# Altium PCB Kapitoshka.PcbDoc
Units mm, origin at the board's own origin, x right, y up, seen from the top; angles counter-clockwise.
Board outline 78 x 40 mm, 4 copper layers (Top Signal Layer, Power Layer, Ground Layer, Bottom Signal Layer), stack 0.778 mm thick; 93 components, 72 nets, 276 pads, 197 vias.
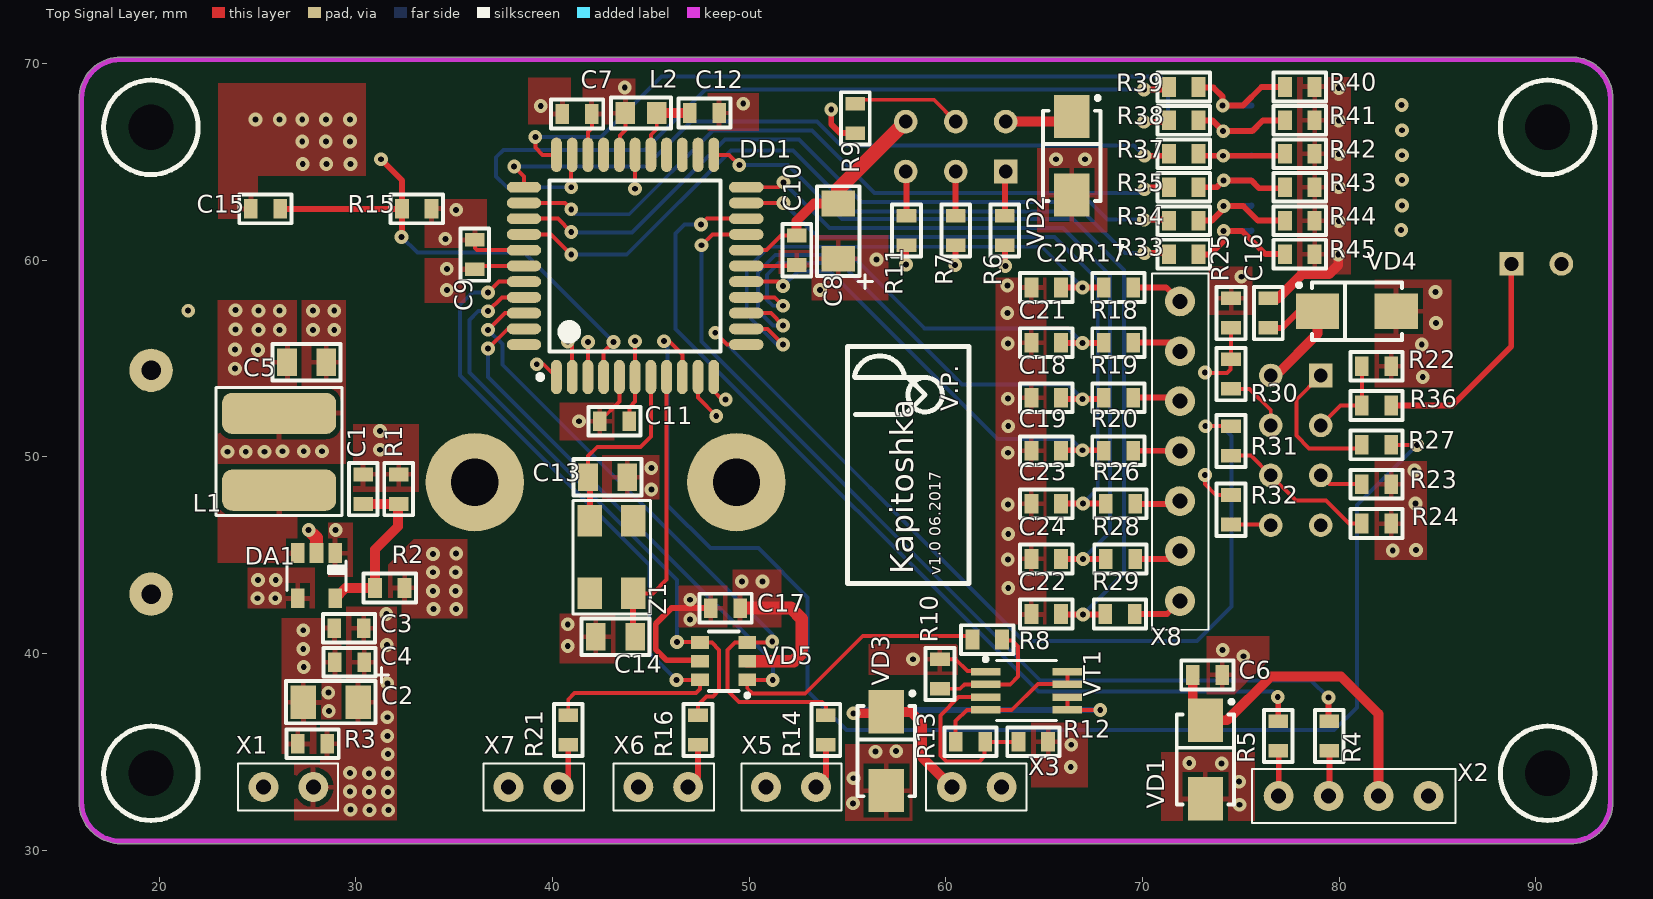
[diagram p0: Top Signal Layer view]
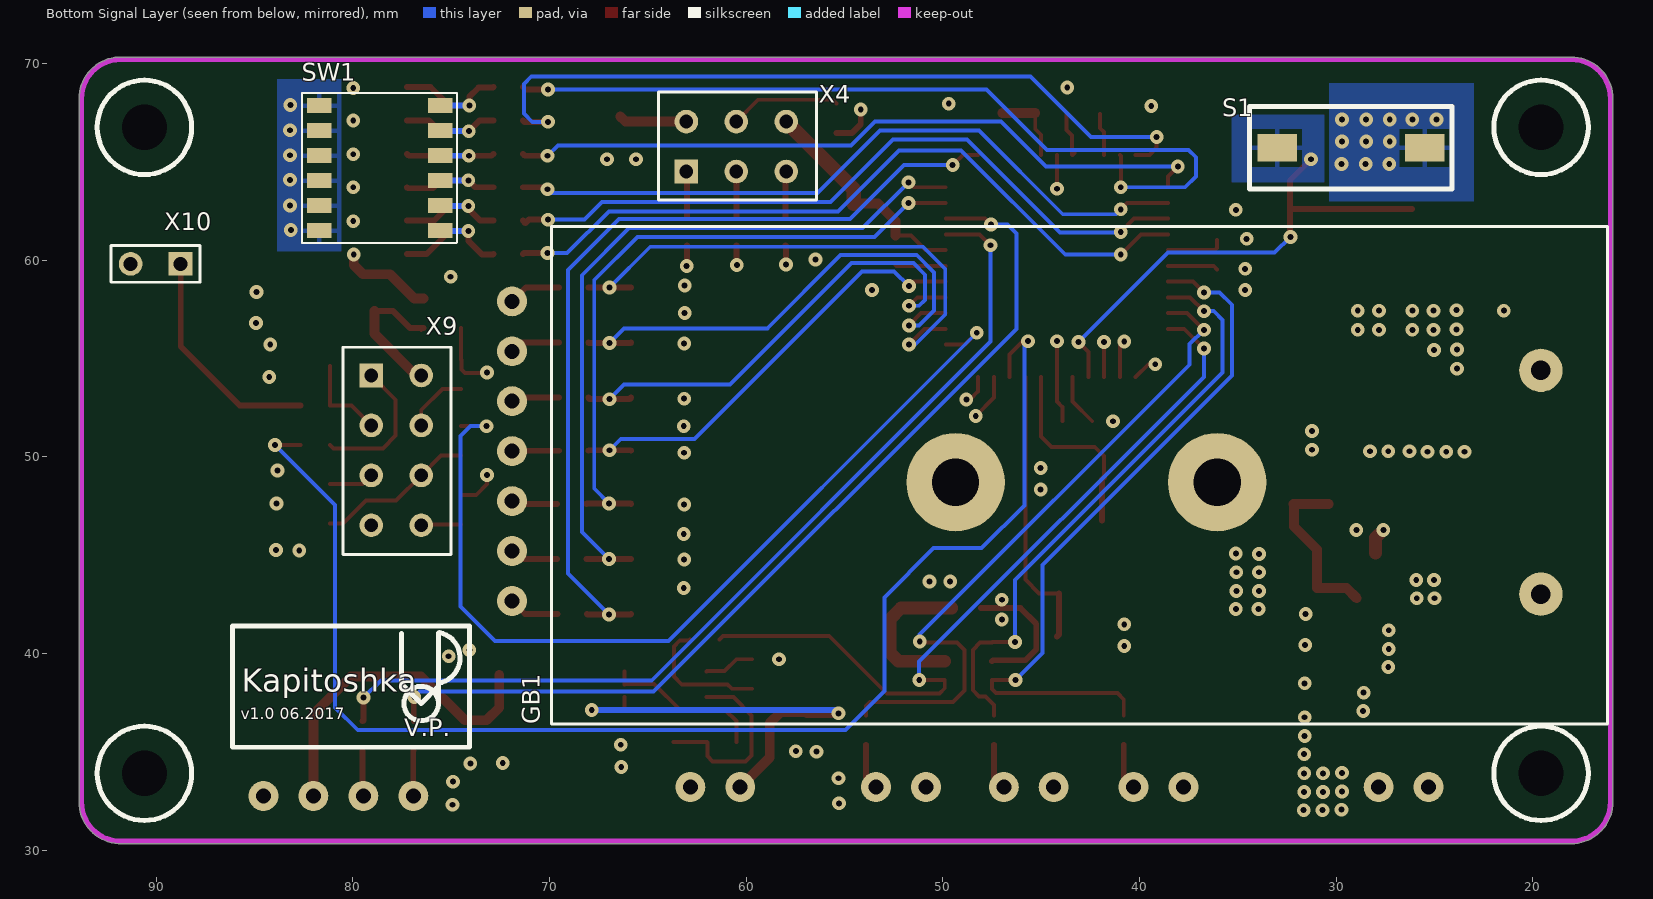
[diagram p1: Bottom Signal Layer view, seen from below]
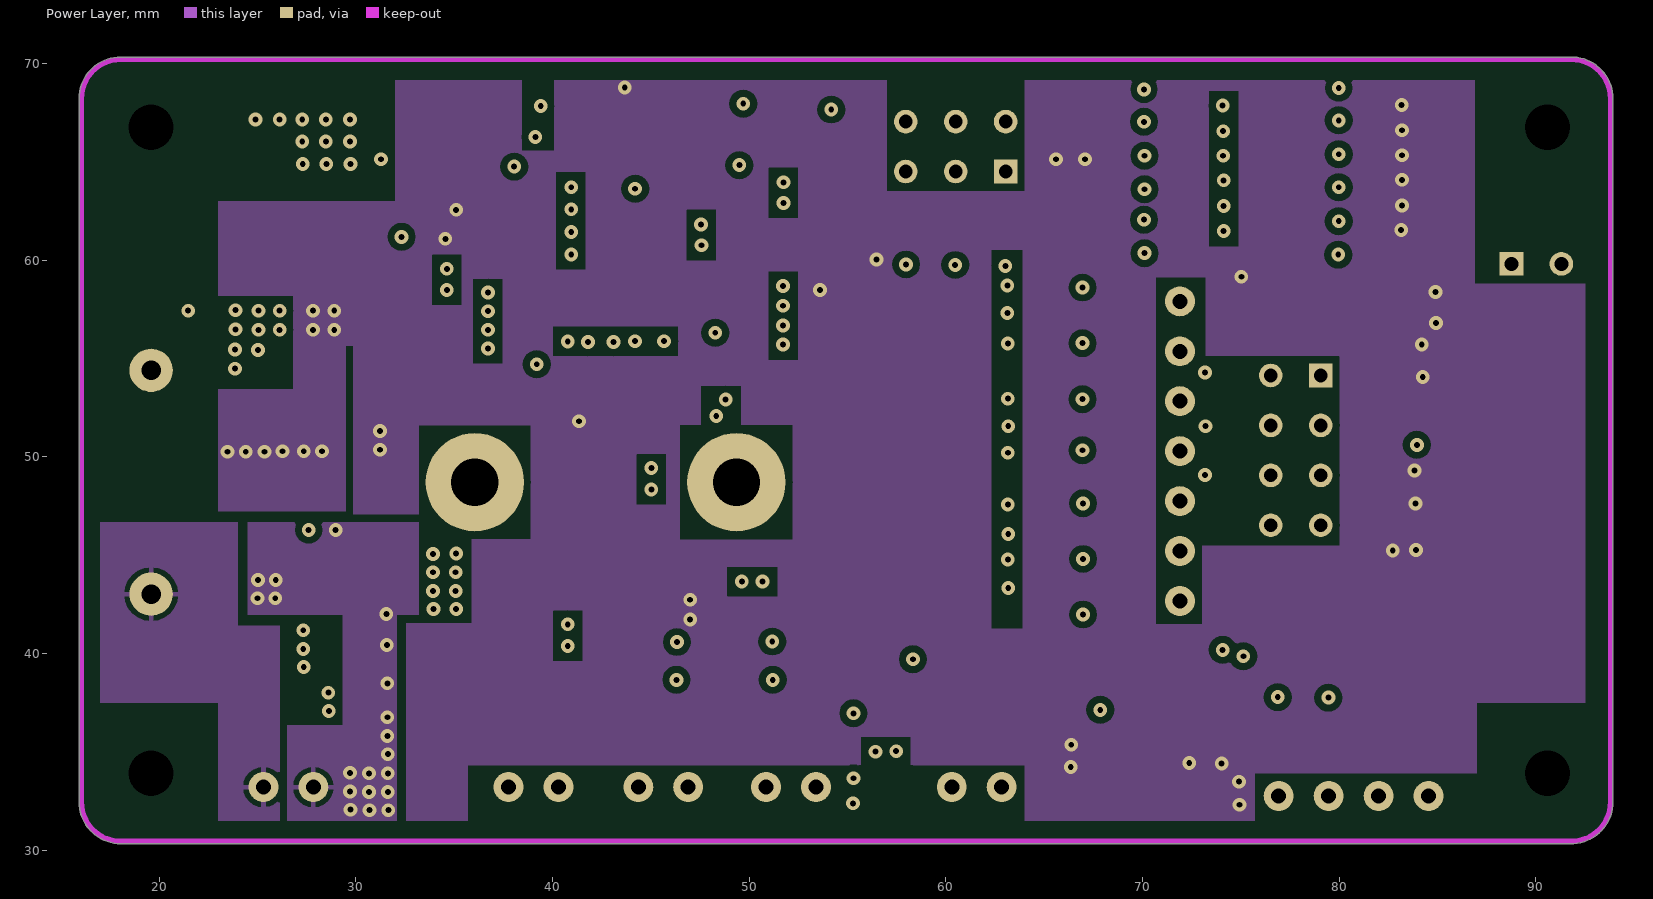
[diagram p2: Power Layer]
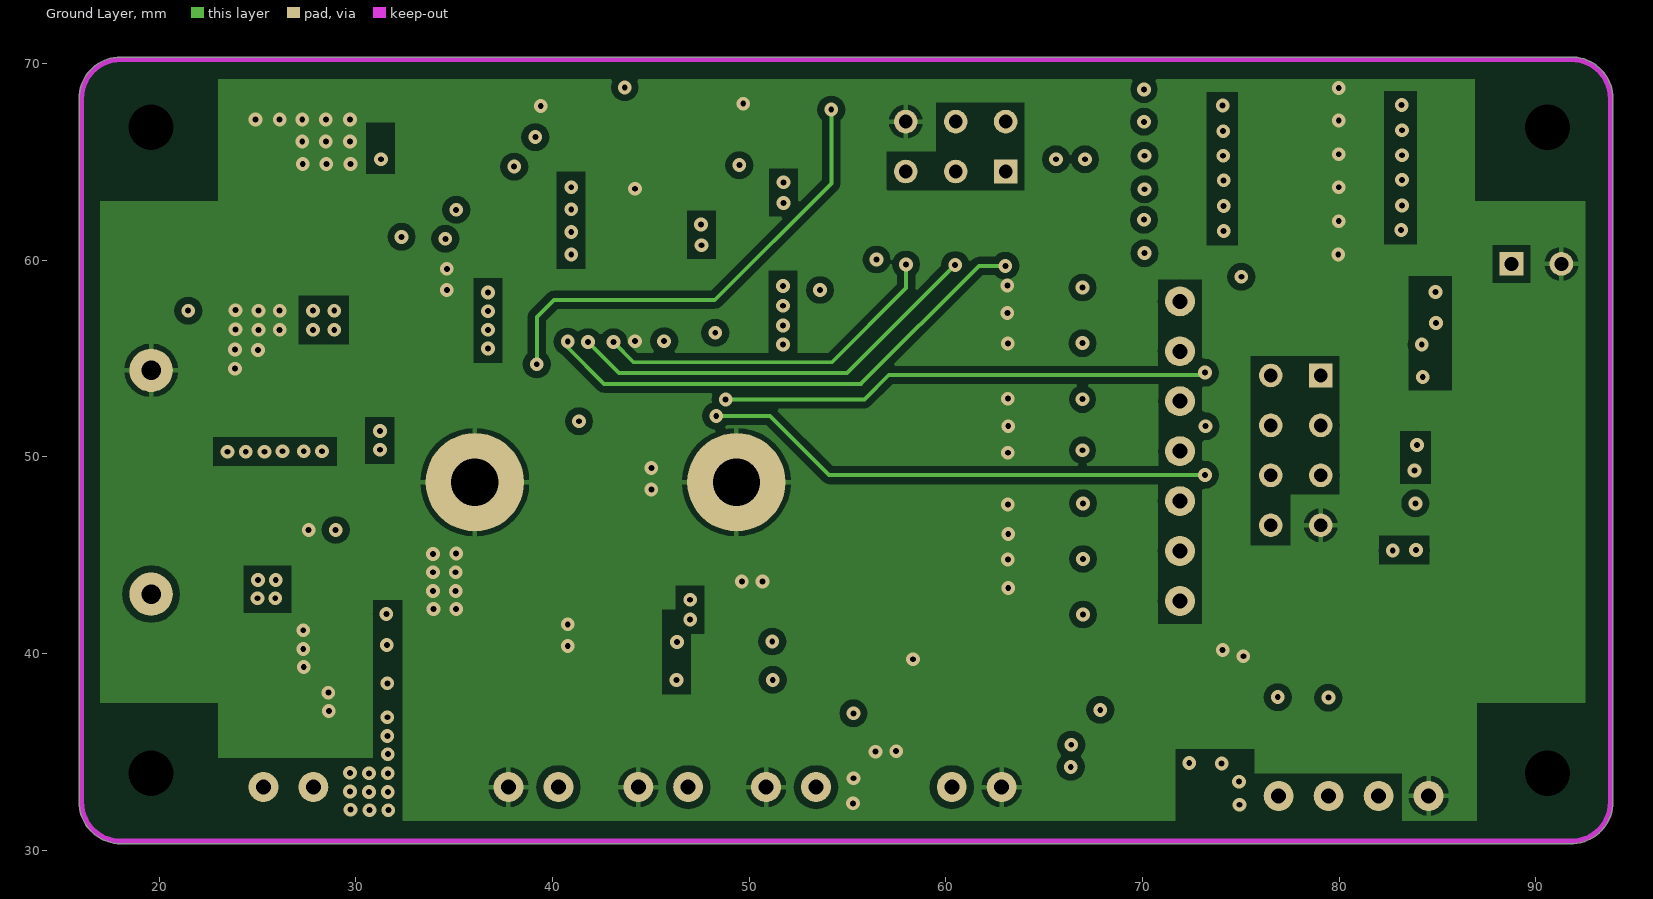
[diagram p3: Ground Layer]

## Layer stack, top to bottom
Top Solder: solder mask 0.0102, Solder Resist, Dk 3.5
Top Signal Layer: signal copper 0.0356
Dielectric 1: core 0.254, FR-4, Dk 4.2
Power Layer: signal copper 0.036
Dielectric 3: prepreg 0.127, Dk 4.2
Ground Layer: signal copper 0.036
Dielectric 2: core 0.254, FR-4, Dk 4.2
Bottom Signal Layer: signal copper 0.0356
Bottom Solder: solder mask 0.0102, Solder Resist, Dk 3.5

## Board outline
18.05,30.323 cw(c18.05,32.45) 15.923,32.45 cw(c16.05,32.45) 15.925,32.472 15.925,68.173 cw(c16.05,68.195) 15.923,68.195 cw(c18.05,68.195) 18.05,70.322 cw(c18.05,70.195) 18.072,70.32 91.773,70.32 cw(c91.795,70.195) 91.795,70.322 cw(c91.795,68.195) 91.887,70.32 91.895,70.32 cw(c91.895,70.195) 91.913,70.319 cw(c91.795,68.195) 93.922,68.195 cw(c93.795,68.195) 93.92,68.173 93.92,32.472 cw(c93.795,32.45) 93.922,32.45 cw(c91.795,32.45) 91.913,30.326 cw(c91.895,30.45) 91.895,30.325 91.887,30.325 cw(c91.795,32.45) 91.795,30.323 cw(c91.795,30.45) 91.773,30.325 18.072,30.325 cw(c18.05,30.45)

## Design rules (kind name [scope] priority, off if disabled: settings)
Clearance Clearance_Inner [OnLayer('Power Layer') OR OnLayer('Ground Layer')] p1: gap=0.35 ignorepadtopadclearanceinfootprint=FALSE except(0: Arc-Hole Track-Hole SMDPad-Hole THPad-Hole Via-Hole Fill-Hole Poly-Hole Region-Hole Text-Hole)
Clearance Clearance_1 [All] p2: gap=0.2 ignorepadtopadclearanceinfootprint=FALSE except(0: Arc-Hole Track-Hole SMDPad-Hole THPad-Hole Via-Hole Fill-Hole Poly-Hole Region-Hole Text-Hole)
ComponentClearance [All] p1: gap=0.254 collisioncheckmode=3 verticalgap=0 showdistances=FALSE
HoleSize [All] p1: absolutevalues=TRUE maxlimit=10 minlimit=0.025 maxpercent=80.000 minpercent=20.000
MinimumSolderMaskSliver [All] p1: minsoldermaskwidth=0.15
PolygonConnect PolygonConnect_via [IsVia] p1: connectstyle=Direct reliefconductorwidth=0.254 reliefentries=4 polygonreliefangle="90 Angle" airgapwidth=0.254
PolygonConnect PolygonConnect_1 [All] p2: connectstyle=Relief reliefconductorwidth=0.254 reliefentries=4 polygonreliefangle="90 Angle" airgapwidth=0.254
RoutingVias [All] p1: holewidth=0.711 width=1.27 viastyle="Through Hole" minholewidth=0.711 minwidth=1.27 maxholewidth=0.711 maxwidth=1.27
ShortCircuit [All] p1: allowed=TRUE
SilkToSilkClearance [All] p1: silktosilkclearance=0
SilkToSolderMaskClearance [IsPad] p1: minsilkscreentomaskgap=0 clearancetoexposedcopper=TRUE
SolderMaskExpansion [All] p1: expansion=0.05
Width Width_1 [All] p1: maxlimit=1 minlimit=0.1 preferedwidth=0.2
Width Width_3.3V [InNet('3,3В')] p2: maxlimit=1 minlimit=0.1 preferedwidth=0.7
24 further rules are at their usual default settings.

## Components (designator, comment, footprint, x,y, rotation, side; value= is the part's Value field where it differs from the comment)
C1 "0.01мк" C0603 30.375,48.35 r90 top
C2 "10мк" "3216 Case-A" 28.7,37.5 r180 top
C3 "4,7мк" C0603 29.65,41.275 r0 top
C4 "2,2мк" C0603 29.675,39.55 r180 top
C5 "10мк" C0805 27.5,54.8 r0 top
C6 "0,1мк" C0603 73.3,38.9 r180 top
C7 "15" C0603 41.25,67.425 r180 top
C8 "10мк" "3216 Case-A" 54.5,61.5 r90 top
C9 "0,1мк" C0603 36.05,60.275 r90 top
C10 "0,1мк" C0603 52.425,60.5 r270 top
C11 "0,1мк" C0603 43.15,51.8 r180 top
C12 "0,1мк" C0603 47.725,67.475 r180 top
C13 "16" C0805 42.8,48.95 r180 top
C14 "16" C0805 43.2,40.85 r0 top
C15 "0,1мк" C0603 25.4,62.6 r0 top
C16 "0,1мк" C0603 76.4,57.3 r270 top
C17 "0,1мк" C0603 48.8,42.3 r180 top
C18 "0,1мк" C0603 65.1,53 r0 top
C19 "0,1мк" C0603 65.1,50.3 r0 top
C20 "0,1мк" C0603 65.1,58.6 r0 top
C21 "0,1мк" C0603 65.1,55.8 r0 top
C22 "0,1мк" C0603 65.1,42 r0 top
C23 "0,1мк" C0603 65.1,47.6 r0 top
C24 "0,1мк" C0603 65.1,44.8 r0 top
DA1 "NCP1529" TSOP-5 28,43.95 r270 top
DD1 "ATmega32A-AU" TQFP-44 44.2,59.7 r90 top
GB1 "Вход питания" KLS5-818-D 42.7,48.7 r180 bottom
L1 "2,2мкГн" SDR0604 26.1,48.3 r180 top
L2 "18мГн" L0603 44.5,67.475 r0 top
R1 "820к" R0603 32.175,48.35 r270 top
R2 "180к" R0603 31.725,43.325 r0 top
R3 "47к" R0603 27.8,35.4 r180 top
R4 "47" R0603 79.5,35.8 r90 top
R5 "47" R0603 76.9,35.8 r90 top
R6 "47" R0603 63,61.5 r270 top
R7 "47" R0603 60.5,61.5 r270 top
R8 "47" R0603 62.1,40.7 r180 top
R9 "47" R0603 55.4,67.2 r270 top
R10 "10к" R0603 59.7,38.95 r90 top
R11 "47" R0603 58,61.5 r270 top
R12 "220" R0603 64.45,35.5 r0 top
R13 "10к" R0603 61.25,35.5 r0 top
R14 "82" R0603 53.9,36.1 r270 top
R15 "47к" R0603 33.1,62.6 r180 top
R16 "82" R0603 47.4,36.1 r270 top
R17 "100к" R0603 68.775,58.6 r0 top
R18 "100к" R0603 68.775,55.8 r0 top
R19 "100к" R0603 68.775,53 r0 top
R20 "100к" R0603 68.775,50.3 r0 top
R21 "82" R0603 40.8,36.1 r270 top
R22 "10к" R0603 81.9,54.6 r0 top
R23 "10к" R0603 81.9,48.6 r0 top
R24 "10к" R0603 81.9,46.6 r0 top
R25 "10к" R0603 74.5,57.3 r90 top
R26 "100к" R0603 68.875,47.6 r0 top
R27 "47" R0603 81.9,50.6 r180 top
R28 "100к" R0603 68.875,44.8 r0 top
R29 "100к" R0603 68.85,42 r0 top
R30 "47" R0603 74.5,54.2 r270 top
R31 "47" R0603 74.5,50.8 r270 top
R32 "47" R0603 74.5,47.3 r270 top
R33 "220" R0603 72.1,60.3 r180 top
R34 "220" R0603 72.1,62 r180 top
R35 "220" R0603 72.1,63.7 r180 top
R36 "560" R0603 81.9,52.6 r0 top
R37 "220" R0603 72.1,65.4 r180 top
R38 "220" R0603 72.1,67.1 r180 top
R39 "220" R0603 72.1,68.8 r180 top
R40 "47к" R0603 78,68.8 r180 top
R41 "47к" R0603 78,67.1 r180 top
R42 "47к" R0603 78,65.4 r180 top
R43 "47к" R0603 78,63.7 r180 top
R44 "47к" R0603 78,62 r180 top
R45 "47к" R0603 78,60.3 r180 top
S1 "RESET" "DTSM 32" 25.5,65.7 r0 bottom
SW1 "NHDS-06" NHDS-06 81.7,61.5 r90 bottom
VD1 "MBR140SFT1G" SMA 73.2,34.6 r270 top
VD2 "MBR140SFT1G" SMA 66.4,65.3 r270 top
VD3 "SS14" SMA 56.975,35.025 r270 top
VD4 "MBR140SFT1G" SMA 80.9,57.4 r0 top
VD5 "TPD4E001" SOT23-6 48.7,39.6 r180 top
VT1 "IRF7509" Micro8 64.1,38.1 r0 top
X1 "Разъем для тумблера питания" 2HOLE 25.3,33.2 r0 top
X2 "Модуль DIY SSD1306" "OLED SSD1306" 84.545,32.75 r180 top
X3 "Вибромотор" 2HOLE 60.3,33.2 r0 top
X4 "Программатор ISP mkII" PLS2-6 60.5,64.5 r90 bottom
X5 "Сигнальный светодиод №1" 2HOLE 53.4,33.2 r180 top
X6 "Красный светодиод №2" 2HOLE 46.9,33.2 r180 top
X7 "Зеленый светодиод №3" 2HOLE 40.3,33.2 r180 top
X8 "Матричная клавиатура" 7HOLE 71.9,57.9 r270 top
X9 "Модуль ESP-8266" ESP8266 79.06,51.59 r180 bottom
X10 "Перемычка" PLS2-2 91.3,59.8 r270 bottom
Z1 "8МГц" QSMD3.2x5 41.9,43.05 r90 top

## Footprints (in the part's own frame and the unit in brackets; to place one, negate y for a bottom-side part, rotate by r counter-clockwise, add the part's x,y. Pads: shape width x height; smd on the part's side, far side on the other; paste and mask are expansions set on the pad)
2HOLE [mil]
  round 60 hole 30: 1(0,0) 2(100,0)
  silkscreen extent -51,-47 150,47
7HOLE [mil]
  round 60 hole 30: 1(0,0) 2(100,0) 3(200,0) 4(300,0) 5(400,0) 6(500,0) 7(600,0)
  silkscreen extent -56,-56 657,57, body extent -50,-289 650,50, height 216
"3216 Case-A" [mm] "Tantalum capacitor 3216 Case-A"
  rect 1.3x1.7 smd: 1(-1.428,-0.024) 2(1.372,-0.024)
  silkscreen extent -2.95,-1.78 2.25,1.06, body extent -1.7,-0.9 1.7,0.9, height 1.7
C0603 [mm]
  rect 0.7x1 smd: 1(-0.75,0) 2(0.75,0)
  silkscreen extent -1.33,-0.73 1.33,0.73, body extent -0.8,-0.4 0.8,0.4, height 0.9
C0805 [mm]
  rect 1x1.4 smd: 1(-1,0) 2(1,0)
  silkscreen extent -1.73,-0.93 1.73,0.93, body extent -1,-0.62 1,0.63, height 0.78
"DTSM 32" [mm] "Кнопка"
  rect 2x1.4 smd: 1(0,0) 3(7.5,0)
  silkscreen extent -1.4,-2.1 8.9,2.1, body extent -0.25,-1.75 7.75,1.75, height 5.5
ESP8266 [mm] "Разъем для ESP8266"
  rect 1.2x1.2 hole 0.7: 1(0,2.54)
  round 1.2 hole 0.7: 2(2.54,2.54) 3(0,0) 4(2.54,0) 5(0,-2.54) 6(2.54,-2.54) 7(0,-5.08) 8(2.54,-5.08)
  silkscreen extent -1.45,-6.58 4.05,3.98, body extent -20.62,-8.52 4.38,5.98, height 5.78
KLS5-818-D [mm]
  round 2.2 hole 1: 1(23.11,-5.69) 2(23.11,5.69)
  round 5 hole 2.4: 2(-6.65,0) 2(6.65,0)
  silkscreen extent -27.2,-12.3 26.5,13, body extent -26.79,-11.81 26.01,12.69, height 13.03
L0603 [mm]
  rect 1x1.1 smd: 1(-0.8,0) 2(0.8,0)
  silkscreen extent -1.53,-0.78 1.53,0.78, body extent -0.8,-0.4 0.8,0.4, height 0.8
Micro8 [mm]
  rect 1.5x0.38 smd: 1(-2.075,0.975) 2(-2.075,0.325) 3(-2.075,-0.325) 4(-2.075,-0.975) 5(2.075,-0.975) 6(2.075,-0.325) 7(2.075,0.325) 8(2.075,0.975)
  silkscreen extent -2.17,-1.53 1.53,1.7, body extent -2.45,-1.5 2.45,1.5, height 1.15
NHDS-06 [mm] "Переключатель DIP 6поз. 1.27мм"
  rect 0.76x1.25 smd: 1(0,-6.15) 2(1.27,-6.15) 3(2.54,-6.15) 4(3.81,-6.15) 5(5.08,-6.15) 6(6.35,-6.15) 7(6.35,0) 8(5.08,0) 9(3.81,0) 10(2.54,0) 11(1.27,0) 12(0,0)
  silkscreen extent -0.63,-7 7,0.87, body extent -0.45,-6.16 6.83,-0.01, height 1.5
"OLED SSD1306" [mil] "OLED дисплей SSD1306"
  round 60 hole 30: 1(0,0) 2(100,0) 3(200,0) 4(300,0)
  silkscreen extent -54,-54 353,54, body extent -89,-1445 388,63, height 202
PLS2-2 [mm]
  rect 1.2x1.2 hole 0.7: 1(0,2.54)
  round 1.2 hole 0.7: 2(0,0)
  silkscreen extent -0.93,-0.99 0.93,3.53, body extent -1.25,-1.27 1.29,3.81, height 8.54
PLS2-6 [mm] "Разъем для программатора ISP"
  rect 1.2x1.2 hole 0.7: 1(0,2.54)
  round 1.2 hole 0.7: 2(2.54,2.54) 3(0,0) 4(2.54,0) 5(0,-2.54) 6(2.54,-2.54)
  silkscreen extent -1.45,-4.08 4.05,3.95, body extent -1.26,-3.91 3.82,3.71, height 8.54
QSMD3.2x5 [mm] "KX-9A 8MHz"
  rect 1.6x1.25 smd: 1(0,-2.2) 2(3.7,0) ""(0,0) ""(3.7,-2.2)
  silkscreen extent -1.05,-3.08 4.72,0.85, body extent -0.65,-2.7 4.35,0.5, height 1.01
R0603 [mm]
  rect 0.7x1 smd: 1(-0.75,0) 2(0.75,0)
  silkscreen extent -1.33,-0.73 1.33,0.73, body extent -0.85,-0.4 0.75,0.4, height 0.5
SDR0604 [mm] "SMD Power Inductors"
  rrect50% 5.8x2.1 smd: 1(0,0) 2(0,-3.9)
  silkscreen extent -3.2,-5.23 3.2,1.3, body extent -2.8,-4.7 2.8,0.8, height 4.55
SMA [mm]
  rect 2.2x1.8 smd: 1(-2,0) 2(2,0)
  silkscreen extent -3.04,-1.46 2.29,1.46, body extent -2.5,-1.35 2.5,1.35, height 2.15
SOT23-6 [mm]
  rect 0.9x0.64 smd: 1(-1.2,0.95) 2(-1.2,0) 3(-1.2,-0.95) 4(1.2,-0.95) 5(1.2,0) 6(1.2,0.95)
  silkscreen extent -1.3,-1.52 0.75,1.84, body extent -1.13,-1.4 1.3,1.4, height 1.09
TQFP-44 [mm]
  oval 1.75x0.55 smd: 1(-5.65,4) 2(-5.65,3.2) 3(-5.65,2.4) 4(-5.65,1.6) 5(-5.65,0.8) 6(-5.65,0) 7(-5.65,-0.8) 8(-5.65,-1.6) 9(-5.65,-2.4) 10(-5.65,-3.2) 11(-5.65,-4) 23(5.65,-4) 24(5.65,-3.2) 25(5.65,-2.4) 26(5.65,-1.6) 27(5.65,-0.8) 28(5.65,0) 29(5.65,0.8) 30(5.65,1.6) 31(5.65,2.4) 32(5.65,3.2) 33(5.65,4)
  oval 0.55x1.75 smd: 12(-4,-5.65) 13(-3.2,-5.65) 14(-2.4,-5.65) 15(-1.6,-5.65) 16(-0.8,-5.65) 17(0,-5.65) 18(0.8,-5.65) 19(1.6,-5.65) 20(2.4,-5.65) 21(3.2,-5.65) 22(4,-5.65) 34(4,5.65) 35(3.2,5.65) 36(2.4,5.65) 37(1.6,5.65) 38(0.8,5.65) 39(0,5.65) 40(-0.8,5.65) 41(-1.6,5.65) 42(-2.4,5.65) 43(-3.2,5.65) 44(-4,5.65)
  silkscreen extent -5.77,-4.35 4.35,4.95, body extent -6,-6 6,6, height 1.1
TSOP-5 [mm]
  rect 1x0.7 smd mask+0: 1(-1.15,0.95) 2(-1.15,0) 3(-1.15,-0.95) 4(1.15,-0.95) 5(1.15,0.95)
  silkscreen extent -0.75,-1.5 0.75,1.5, body extent -1.35,-1.5 1.35,1.5, height 1

## Part data
C1 C3 C4 C5 C6 C7 C9 C10 C11 C12 C13 C14 C15 C16 C17 C18 C19 C20 C21 C22 C23 C24: library part Capacitor, "Конденсатор"
C2 C8: library part Capacitor_pol, "Конденсатор полярный"
DA1: "Output Voltage Step-down  Converter"
DD1: "Микроконтроллер 44-pin"
GB1: library part "Battery compartment"
L1 L2: library part Inductor, "Катушка индуктивности"
R1 R2 R4 R5 R8 R10 R12 R17 R18 R19 R20 R26 R27 R28 R29 R30 R31 R32 R33 R34 R35 R36 R37 R38 R39: library part Resistor_0,125Вт, "0.125Вт 0805 47 Ом, 1%, Чип резистор (SMD)"
R3 R6 R7 R9 R11 R15 R22 R23 R24 R25 R40 R41 R42 R43 R44 R45: library part Resistor_0,125Вт, "Резистор"
R13: library part Resistor_0,125Вт, "0.125Вт 0805 10 кОм, 1%, Чип резистор (SMD)"
R14 R16 R21: library part Resistor_0,05Вт, "Резистор"
S1: library part Button_SMD, "Кнопка"
SW1: library part DS1040-06, "DIP переключатель"
VD1 VD2 VD3 VD4: library part DiodeSchottky, "Диод Шоттки"
VD5: "Диодная сборка"
VT1: "Комплементарная сборка МОП"
X1 X3 X5 X6 X7: library part Header_2_sct, "Разъем - 2 конт. розетка"
X2: library part Header_4_sct, "Разъем - 4 конт. розетка"
X4: library part Header_6_sct, "Разъем - 5 конт. розетка"
X8: library part Header_7_sct_, "Разъем - 5 конт. розетка"
X9: library part Header_8_sct, "Разъем - 5 конт. розетка"
X10: library part Header_2_plg, "Разъем - 2 конт. вилка"
Z1: library part Crystal, "Кварцевый резонатор"

## Free pads (board coordinates)
  round 0 hole 2.3: ""(19.58,33.9) ""(19.58,66.745) ""(90.595,33.9) ""(90.595,66.745)

## Via types
v1: diameter 0.7, hole 0.3, Top Signal Layer to Bottom Signal Layer, tented both sides, 197 vias

## Nets (pads, with @x,y where several pads share a name; then routed paths per layer and width w, separated by ;. In a path a pad name is that pad's centre, name@x,y a point inside that pad or via, vN(x,y) a via of type N, cw(c..) or ccw(c..) an arc to the next point about the centre after c; other vN are vias at no path point)
3,3В: C1.2 C5.2 C7.1 C8.1 C9.2 C10.2 C11.2 C17.2 DD1.5 DD1.17 DD1.29 DD1.31 DD1.38 L1.2 L2.1 R1.1 R12.2 R15.1 R22.2 R23.2 R24.2 R25.2 SW1.7 SW1.8 SW1.9 SW1.10 SW1.11 SW1.12 VD1.2 VD2.2 VD4.2 VD5.5 | length 19.7
  Top Signal Layer w0.2: C9.2 36.05,60.6 36.15,60.5 DD1.38 ; DD1.31 41.8,66.5 42,66.7 C7.1 ; C11.2 43.4,52.8 DD1.5 ; DD1.29@43.3,65.45 DD1.29 43.425,65.375 43.425,66.325 43.7,66.6 L2.1 ; DD1.17 52.35,59.7 C10.2@52.4,59.75
  Top Signal Layer w0.3: VD5.5 47.45,39.65 45.8,39.65 45.25,40.2 45.25,41.5 46.05,42.3 C17.2
  other v1: 74.925,32.3 74.9,33.475 66.35,34.225 74.025,34.4 72.375,34.425 66.375,35.35 47,41.725 47,42.725 82.725,45.225 83.9,45.25 83.875,47.625 83.825,49.3 23.475,50.25 24.4,50.25 25.35,50.25 26.275,50.275 27.35,50.275 28.275,50.275 31.225,50.35 31.225,51.3 41.35,51.8 84.25,54.05 84.2,55.7 27.825,56.45 28.9,56.45 84.925,56.8 27.825,57.425 28.9,57.425 84.9,58.375 53.6,58.475 75.025,59.15 56.475,60.025 34.55,61.075 83.15,61.525 35.1,62.55 83.2,62.775 83.2,64.075 65.6,65.125 67.075,65.125 83.2,65.325 83.2,66.6 83.175,67.875 43.675,68.775
3,7В: C2.1 C3.2 C4.1 DA1.1 DA1.4 R3.1 X1.2
  other v1: 30.7,32.025 31.65,32.025 29.725,32.05 30.675,32.95 31.625,32.95 29.7,32.975 30.675,33.9 31.625,33.9 29.7,33.925 31.625,34.875 31.6,35.8 31.6,36.75 31.6,38.475 31.575,40.425 31.55,42 25,42.8 25.9,42.8 25.025,43.725 25.925,43.725 28.975,46.275
GND: C2.2 C3.1 C4.2 C5.1 C6.1 C7.2 C8.2 C9.1 C10.1 C11.1 C12.1 C13.1 C14.1 C15.1 C16.1 C17.1 C18.1 C19.1 C20.1 C21.1 C22.1 C23.1 C24.1 DA1.2 DD1.6 DD1.18 DD1.28 DD1.39 GB1.2 R2.2 R3.2 R10.2 R40.1 R41.1 R42.1 R43.1 R44.1 R45.1 S1.1 VD3.2 VD5.2 VT1.1 X2.1 X3.2 X4.6 X5.2 X6.2 X7.2 X9.7 X10.2 | length 36.9
  Top Signal Layer w0.2: C9.1 36.225,59.7 DD1.39 ; C11.1 43.925,51.825 43.925,52.53 44.2,52.805 DD1.6 v1(44.2,55.875) ; v1(44.2,63.625) DD1.28 ; DD1.18 50.875,60.5 51.625,61.25 C10.1@52.4,61.25 ; R10.2 60.5,39.7 61.1,39.1 62,39.1 VT1.1
  Top Signal Layer w0.5: C10.1@52.4,61.25 52.4,61.975 53.297,62.872 C8.2 ; C16.1 76.875,58.05 78.1,59.275 79.475,59.275 79.95,59.75 v1(79.95,60.275)
  Top Signal Layer w0.65: v1(27.6,46.275) 28,45.875 DA1.2 ; C17.1 52.125,42.3 52.675,41.75 52.675,40.025 52.25,39.6 VD5.2
  Top Signal Layer w0.75: C8.2 54.524,63.604 X4.6
  other v1: 55.275,32.375 55.3,33.65 56.425,35 57.475,35.025 28.625,37.075 28.6,38 27.35,39.3 58.325,39.7 75.125,39.85 74.075,40.175 27.325,40.225 40.775,40.375 27.325,41.175 40.775,41.475 33.95,42.25 35.1,42.25 33.925,43.175 35.075,43.175 63.175,43.325 49.625,43.65 50.675,43.65 33.925,44.125 35.075,44.125 63.15,44.775 33.925,45.05 35.1,45.075 63.175,46.075 63.15,47.575 45.025,48.325 45.025,49.425 63.15,50.2 63.175,51.55 63.15,52.95 23.85,54.475 25.025,55.425 23.85,55.45 63.15,55.75 25.05,56.45 26.125,56.45 23.875,56.475 63.125,57.3 25.05,57.425 26.125,57.425 23.875,57.45 34.625,58.469 63.125,58.7 34.625,59.55 79.975,61.975 79.975,63.7 27.3,64.875 28.5,64.875 29.725,64.875 79.975,65.375 27.275,66.025 28.475,66.025 29.7,66.025 79.975,67.1 24.9,67.15 26.125,67.15 27.275,67.15 28.475,67.15 29.7,67.15 39.4,67.826 49.7,67.95 79.975,68.75
MCU_ADR_0: DD1.37 R33.2 | length 37.6
  Top Signal Layer w0.2: DD1.37 39.925,61.3 v1(40.95,60.275)
  Top Signal Layer w0.3: v1(70.1,60.35) 71.3,60.35 R33.2
  Bottom Signal Layer w0.2: v1(40.95,60.275) 43.775,60.275 49.075,65.575 52.225,65.575 55.325,62.475 66.975,62.475 69.1,60.35 v1(70.1,60.35)
MCU_ADR_1: DD1.36 R34.2 | length 36.9
  Top Signal Layer w0.2: DD1.36 40.275,62.1 v1(40.95,61.425)
  Top Signal Layer w0.3: v1(70.075,62.05) 71.05,62.05 71.225,61.875 R34.2
  Bottom Signal Layer w0.2: v1(40.95,61.425) 40.975,61.4 44.05,61.4 48.775,66.125 52.525,66.125 55.7,62.95 67.325,62.95 68.225,62.05 v1(70.075,62.05)
MCU_ADR_2: DD1.35 R35.2 | length 36.2
  Top Signal Layer w0.2: DD1.35 40.625,62.9 v1(40.95,62.575)
  Top Signal Layer w0.3: v1(70.1,63.6) 70.2,63.7 R35.2
  Bottom Signal Layer w0.2: v1(40.95,62.575) 41.2,62.325 43.9,62.325 48.15,66.575 53.2,66.575 56.375,63.4 69.9,63.4 v1(70.1,63.6)
MCU_ADR_3: DD1.34 R37.2 | length 36.3
  Top Signal Layer w0.2: v1(38.05,64.75) 38.55,64.25 DD1.34
  Top Signal Layer w0.3: v1(70.1,65.3) 71.25,65.3 R37.2
  Bottom Signal Layer w0.2: v1(38.05,64.75) 44.75,64.75 47.05,67.05 53.45,67.05 54.675,65.825 69.575,65.825 v1(70.1,65.3)
MCU_ADR_4: DD1.33 R38.2 | length 39.6
  Top Signal Layer w0.2: v1(39.125,66.25) 39.125,65.725 39.5,65.35 DD1.33
  Top Signal Layer w0.3: v1(70.075,67.025) 71.275,67.025 R38.2
  Bottom Signal Layer w0.2: v1(39.125,66.25) 42.475,66.25 45.55,69.325 70.925,69.325 71.3,68.95 71.3,67.45 70.875,67.025 v1(70.075,67.025)
MCU_ADR_5: DD1.32 R39.2 | length 42.4
  Top Signal Layer w0.2: v1(40.95,63.7) 40.95,65.3 DD1.32
  Top Signal Layer w0.3: v1(70.075,68.675) 71.225,68.675 R39.2
  Bottom Signal Layer w0.2: v1(40.95,63.7) 37.675,63.7 37.125,64.25 37.125,65.225 37.5,65.6 44.7,65.6 47.775,68.675 v1(70.075,68.675)
MCU_CH_PD: DD1.12 R31.1 | length 46.8
  Top Signal Layer w0.2: v1(48.275,56.3) 48.875,55.7 DD1.12 ; v1(73.2,51.55) R31.1
  Bottom Signal Layer w0.2: v1(48.275,56.3) 63.95,40.625 72.775,40.625 74.525,42.375 74.525,51.05 74.025,51.55 v1(73.2,51.55)
MCU_COL_1: C20.2 DD1.13 R17.1 | length 27.6
  Top Signal Layer w0.2: DD1.13 50.925,56.5 v1(51.725,55.7)
  Top Signal Layer w0.3: C20.2 v1(66.95,58.6) R17.1
  Bottom Signal Layer w0.2: v1(51.725,55.7) 51.4,55.7 49.875,57.225 49.875,59.55 51,60.675 64.875,60.675 v1(66.95,58.6)
MCU_COL_2: C21.2 DD1.14 R18.1 | length 26.6
  Top Signal Layer w0.2: DD1.14 51.1,57.3 v1(51.725,56.675)
  Top Signal Layer w0.3: C21.2 65.875,55.775 v1(66.95,55.775) 68,55.775 R18.1
  Bottom Signal Layer w0.2: v1(51.725,56.675) 51.2,56.675 50.45,57.425 50.45,59.375 51.325,60.25 55.2,60.25 58.925,56.525 66.2,56.525 v1(66.95,55.775)
MCU_COL_3: C18.2 DD1.15 R19.1 | length 25.7
  Top Signal Layer w0.2: DD1.15 51.3,58.1 v1(51.725,57.675)
  Top Signal Layer w0.3: C18.2 65.925,52.925 v1(66.95,52.925) 67.95,52.925 R19.1
  Bottom Signal Layer w0.2: v1(51.725,57.675) 51.2,57.675 50.9,57.975 50.9,59.25 51.5,59.85 54.65,59.85 60.825,53.675 66.2,53.675 v1(66.95,52.925)
MCU_DOUT1: DD1.42 R14.1 VD5.3 | length 34.3
  Top Signal Layer w0.2: v1(36.725,56.45) 37.575,57.3 DD1.42 ; v1(51.175,40.6) 51.125,40.55 VD5.3 49.275,40.55 48.9,40.175 48.9,38.1 49.475,37.525 53.7,37.525 53.9,37.325 R14.1
  Bottom Signal Layer w0.2: v1(36.725,56.45) 37.45,55.725 37.45,54.675 51.175,40.95 v1(51.175,40.6)
MCU_DOUT2: DD1.41 R16.1 VD5.4 | length 30.3
  Top Signal Layer w0.2: v1(36.725,57.4) 37.425,58.1 DD1.41 ; v1(46.325,40.575) 47.475,40.575 VD5.4 48.1,40.55 48.475,40.175 48.475,38.125 48.15,37.8 47.825,37.8 47.4,37.375 R16.1
  Bottom Signal Layer w0.2: v1(36.725,57.4) 36.225,57.4 35.775,56.95 35.775,54.275 46.325,43.725 v1(46.325,40.575)
MCU_DOUT3: DD1.40 R21.1 VD5.6 | length 36.8
  Top Signal Layer w0.2: v1(36.725,58.35) 37.275,58.9 DD1.40 ; R21.1 40.8,37.65 41.125,37.975 47.285,37.975 47.5,38.19 VD5.6 v1(46.3,38.65)
  Bottom Signal Layer w0.2: v1(36.725,58.35) 35.925,58.35 35.3,57.725 35.3,54.125 44.93,44.495 44.93,40.02 v1(46.3,38.65)
MCU_ESP_RESET: DD1.11 R25.1 R30.1 | length 30
  Top Signal Layer w0.2: DD1.11 48.2,53.325 48.622,52.903 v1(48.802,52.903) ; v1(73.175,54.275) 73.2,54.25 74.3,54.25 74.475,54.425 74.475,54.925 R30.1 R25.1
  Ground Layer w0.2: v1(48.802,52.903) 55.853,52.903 57.098,54.148 73.048,54.148 v1(73.175,54.275)
MCU_LINE_1: C19.2 DD1.16 R20.1 | length 23.5
  Top Signal Layer w0.2: DD1.16 51.5,58.9 v1(51.725,58.675)
  Top Signal Layer w0.3: C19.2 65.875,50.325 v1(66.95,50.325) 68,50.325 R20.1
  Bottom Signal Layer w0.2: v1(51.725,58.675) 52.475,59.425 54.1,59.425 62.625,50.9 66.375,50.9 v1(66.95,50.325)
MCU_LINE_2: C23.2 DD1.21 R26.1 | length 33.5
  Top Signal Layer w0.2: DD1.21 v1(51.75,62.9)
  Top Signal Layer w0.3: C23.2 65.875,47.625 v1(66.975,47.625) 68.1,47.625 R26.1
  Bottom Signal Layer w0.2: v1(51.75,62.9) 53.475,61.175 65.525,61.175 67.725,58.975 67.725,48.375 v1(66.975,47.625)
MCU_LINE_3: C24.2 DD1.22 R28.1 | length 37.8
  Top Signal Layer w0.2: DD1.22 51.5,63.7 v1(51.75,63.95)
  Top Signal Layer w0.3: C24.2 v1(66.975,44.8) R28.1
  Bottom Signal Layer w0.2: v1(51.75,63.95) 54.075,61.625 65.95,61.625 68.35,59.225 68.35,46.175 v1(66.975,44.8)
MCU_LINE_4: C22.2 DD1.23 R29.1 | length 43.9
  Top Signal Layer w0.2: DD1.23 48.975,65.35 v1(49.5,64.825)
  Top Signal Layer w0.3: C22.2 65.875,41.975 v1(66.975,41.975) 68.075,41.975 R29.1
  Bottom Signal Layer w0.2: v1(49.5,64.825) 51.975,64.825 54.725,62.075 66.475,62.075 69.05,59.5 69.05,44.05 v1(66.975,41.975)
MCU_MISO: DD1.2 R6.2 | length 28.7
  Top Signal Layer w0.2: v1(40.775,55.85) 41,55.625 DD1.2
  Top Signal Layer w0.3: R6.2 63,59.725 v1(63.025,59.7)
  Ground Layer w0.2: v1(40.775,55.85) 40.775,55.55 42.622,53.703 55.689,53.703 ; 55.689,53.711 61.678,59.7 v1(63.025,59.7)
MCU_MOSI: DD1.1 R9.2 | length 27.4
  Top Signal Layer w0.2: v1(39.2,54.7) 39.55,54.7 DD1.1
  Top Signal Layer w0.3: v1(54.175,67.65) 54.175,66.9 54.625,66.45 R9.2
  Ground Layer w0.2: v1(39.2,54.7) 39.2,57.1 40.075,57.975 48.25,57.975 54.175,63.9 v1(54.175,67.65)
MCU_MOTOR: DD1.43 R8.2 VD5.1 | length 39.7
  Top Signal Layer w0.2: v1(36.725,55.5) 37.725,56.5 DD1.43 ; v1(51.2,38.65) VD5.1 49.9,38.225 50.175,37.95 52.85,37.95 55.775,40.875 61.175,40.875 R8.2
  Bottom Signal Layer w0.2: v1(36.725,55.5) 36.725,54.05 51.2,39.575 v1(51.2,38.65)
MCU_RESET: C15.2 DD1.4 R11.2 R15.2 S1.3 | length 44.6
  Top Signal Layer w0.2: DD1.4 42.6,55.325 v1(43.1,55.825)
  Top Signal Layer w0.3: C15.2 R15.2 ; v1(31.275,65.125) 32.35,64.05 R15.2 ; v1(32.325,61.175) 32.35,61.2 R15.2 ; v1(57.975,59.775) 57.975,60.725 R11.2
  Ground Layer w0.2: v1(43.1,55.825) 44.122,54.803 54.203,54.803 57.975,58.575 v1(57.975,59.775)
  Bottom Signal Layer w0.2: v1(32.325,61.175) 33.125,60.375 38.55,60.375 v1(43.1,55.825)
MCU_RX: DD1.9 R27.1 | length 69.7
  Top Signal Layer w0.2: v1(45.675,55.875) 45.925,55.875 46.6,55.2 DD1.9 ; R27.1 v1(83.95,50.6)
  Bottom Signal Layer w0.2: v1@45.85,55.875 45.85,47.525 48.025,45.35 50.475,45.35 52.975,42.85 52.975,38.075 54.95,36.1 79.75,36.1 80.9,37.25 80.9,47.55 v1(83.95,50.6)
MCU_SCK: DD1.3 R7.2 | length 24.4
  Top Signal Layer w0.2: DD1.3 v1(41.8,55.825)
  Top Signal Layer w0.3: v1(60.475,59.75) 60.5,59.775 R7.2
  Ground Layer w0.2: v1(41.8,55.825) 43.372,54.253 54.978,54.253 v1(60.475,59.75)
MCU_SCL: DD1.19 R4.2 | length 48
  Top Signal Layer w0.2: v1(47.575,60.75) 48.125,61.3 DD1.19
  Top Signal Layer w0.3: v1(79.45,37.75) 79.45,36.6 R4.2
  Bottom Signal Layer w0.2: v1(47.575,60.75) 47.575,55.85 64.8,38.625 78.575,38.625 v1(79.45,37.75)
MCU_SDA: DD1.20 R5.2 | length 48.4
  Top Signal Layer w0.2: v1(47.55,61.8) 47.85,62.1 DD1.20
  Top Signal Layer w0.3: v1(76.875,37.775) 76.9,37.75 R5.2
  Bottom Signal Layer w0.2: v1(47.55,61.8) 46.7,61.8 46.25,61.35 46.25,56.5 64.7,38.05 76.6,38.05 v1(76.875,37.775)
MCU_TX: DD1.10 R32.1 | length 30.5
  Top Signal Layer w0.2: DD1.10 47.4,53 v1(48.325,52.075) ; v1(73.175,49.075) 73.175,48.6 73.725,48.05 R32.1
  Ground Layer w0.2: v1(48.325,52.075) 51.05,52.075 54.057,49.068 73.168,49.068 v1(73.175,49.075)
NetC1_1: C1.1 DA1.5 R1.2 R2.1 | length 8.8
  Top Signal Layer w0.5: DA1.5 29.475,43.325 R2.1 30.975,45.275 32.15,46.45 32.15,47.575 R1.2 C1.1
NetC6_2: C6.2 VD1.1 X2.2 | length 17.3
  Top Signal Layer w0.5: C6.2 72.55,37.25 VD1.1 74.3,36.6 76.525,38.825 80.1,38.825 82,36.925 82,32.755 X2.2
NetC12_2: C12.2 DD1.27 L2.2 | length 4.1
  Top Signal Layer w0.2: DD1.27 45,66.37 45.3,66.67 L2.2 ; L2.2@45.3,67.6 L2.2@45.4,67.5
  Top Signal Layer w0.5: L2.2 C12.2
NetC13_2: C13.2 DD1.7 Z1.2 | length 10
  Top Signal Layer w0.2: C13.2 41.8,50.025 42.275,50.5 44.475,50.5 45,51.025 DD1.7
  Top Signal Layer w0.3: C13.2 41.9,48.85 Z1.2
NetC14_2: C14.2 DD1.8 Z1.1 | length 14.5
  Top Signal Layer w0.2: Z1.1 45.1,43.05 45.8,43.75 DD1.8
  Top Signal Layer w0.3: Z1.1 44.1,40.95 C14.2
NetC16_2: C16.2 VD4.1 X9.2 | length 7.4
  Top Signal Layer w0.2: C16.2 C16.2@76.52,56.43
  Top Signal Layer w0.3: C16.2 77.1,56.55 77.95,57.4 VD4.1
  Top Signal Layer w0.5: X9.2 76.78,54.13 78.9,56.25 VD4.1
NetDA1_3: DA1.3 L1.1
NetGB1_1: GB1.1 X1.1
NetR4_1: R4.1 X2.3 | length 2.3
  Top Signal Layer w0.3: X2.3 79.5,32.785 R4.1
NetR5_1: R5.1 X2.4 | length 2.3
  Top Signal Layer w0.3: R5.1 76.925,35.025 X2.4
NetR6_1: R6.1 X4.1 | length 2.3
  Top Signal Layer w0.3: R6.1 63,64.46 X4.1
NetR7_1: R7.1 X4.3 | length 2.3
  Top Signal Layer w0.3: R7.1 X4.3
NetR8_1: R8.1 R10.1 VT1.2 | length 6.7
  Top Signal Layer w0.2: R10.1 60.725,38.2 60.95,38.425 VT1.2 63.275,38.425 63.675,38.825 63.675,40.35 63.375,40.65 62.9,40.65 R8.1
NetR9_1: R9.1 X4.4 | length 5.6
  Top Signal Layer w0.2: R9.1 55.6,68.15 59.39,68.15 X4.4
NetR11_1: R11.1 X4.5 | length 2.3
  Top Signal Layer w0.3: X4.5 58,64.46 R11.1
NetR12_1: R12.1 R13.2 VT1.3 | length 9.7
  Top Signal Layer w0.2: VT1.3 60.65,37.775 59.725,36.85 59.725,34.8 60.025,34.5 61.7,34.5 61.975,34.775 61.975,35.475 R13.2 R12.1
NetR13_1: R13.1 VT1.4 VT1.7 VT1.8 | length 8.2
  Top Signal Layer w0.2: R13.1 60.5,36.55 61.075,37.125 VT1.4 63.35,37.125 64.675,38.45 66.15,38.45 VT1.7 VT1.8
NetR14_2: R14.2 X5.1 | length 2.4
  Top Signal Layer w0.3: X5.1 53.9,33.7 R14.2
NetR16_2: R16.2 X6.1 | length 2.4
  Top Signal Layer w0.3: X6.1 47.4,33.7 R16.2
NetR17_2: R17.2 X8.1 | length 2.7
  Top Signal Layer w0.3: R17.2 71.2,58.6 X8.1
NetR18_2: R18.2 X8.2 | length 2.6
  Top Signal Layer w0.3: R18.2 71.46,55.8 X8.2
NetR19_2: R19.2 X8.3 | length 2.4
  Top Signal Layer w0.3: R19.2 71.72,53 X8.3
NetR20_2: R20.2 X8.4 | length 2.4
  Top Signal Layer w0.3: R20.2 71.88,50.3 X8.4
NetR21_2: R21.2 X7.1 | length 2.4
  Top Signal Layer w0.3: X7.1 40.8,33.7 R21.2
NetR22_1: R22.1 R36.1 X9.3 | length 4.5
  Top Signal Layer w0.2: X9.3 80.07,52.6 R36.1 R22.1
NetR23_1: R23.1 X9.5 | length 2.3
  Top Signal Layer w0.2: X9.5 79.51,48.6 R23.1
NetR24_1: R24.1 R31.2 X9.6 | length 8.1
  Top Signal Layer w0.2: R31.2 75.52,50.05 X9.6 77.795,47.775 79.325,47.775 80.5,46.6 R24.1
NetR26_2: R26.2 X8.5 | length 2.3
  Top Signal Layer w0.3: R26.2 71.76,47.6 X8.5
NetR27_2: R27.2 X9.1 | length 7.2
  Top Signal Layer w0.2: X9.1 77.825,52.895 77.825,51.075 78.475,50.425 80.975,50.425 R27.2
NetR28_2: R28.2 X8.6 | length 2.4
  Top Signal Layer w0.3: R28.2 71.5,44.8 X8.6
NetR29_2: R29.2 X8.7 | length 2.6
  Top Signal Layer w0.3: R29.2 71.24,42 X8.7
NetR30_2: R30.2 X9.4 | length 3.3
  Top Signal Layer w0.2: R30.2 75.45,53.45 76.52,52.38 X9.4
NetR32_2: R32.2 X9.8 | length 2
  Top Signal Layer w0.2: R32.2 76.48,46.55 X9.8
NetR33_1: R33.1 R45.2 SW1.1 | length 7.1
  Top Signal Layer w0.3: R33.1 72.875,60.275 73.425,60.275 74.125,60.975 v1(74.125,61.475) 75.075,61.475 76.25,60.3 R45.2
  Bottom Signal Layer w0.3: v1(74.125,61.475) 75.525,61.475 SW1.1
NetR34_1: R34.1 R44.2 SW1.2 | length 6.5
  Top Signal Layer w0.3: R34.1 73.525,62 74.125,62.6 v1(74.125,62.75) 75.125,62.75 75.875,62 R44.2
  Bottom Signal Layer w0.3: v1(74.125,62.75) 75.53,62.75 SW1.2
NetR35_1: R35.1 R43.2 SW1.3 | length 6.2
  Top Signal Layer w0.3: R35.1 73.775,63.7 v1(74.125,64.05) 75.525,64.05 75.925,63.65 77.2,63.65 R43.2
  Bottom Signal Layer w0.3: v1(74.125,64.05) 75.54,64.05 SW1.3
NetR36_2: R36.2 X10.1 | length 11.5
  Top Signal Layer w0.3: R36.2 85.75,52.6 88.75,55.6 88.75,59.79 X10.1
NetR37_1: R37.1 R42.2 SW1.4 | length 5.9
  Top Signal Layer w0.3: R37.1 72.95,65.3 v1(74.1,65.3) 77.15,65.3 R42.2
  Bottom Signal Layer w0.3: v1(74.1,65.3) 75.54,65.3 SW1.4
NetR38_1: R38.1 R41.2 SW1.5 | length 6.3
  Top Signal Layer w0.3: R38.1 73.55,67.1 v1(74.1,66.55) 75.575,66.55 76.125,67.1 R41.2
  Bottom Signal Layer w0.3: v1(74.1,66.55) 75.52,66.55 SW1.5
NetR39_1: R39.1 R40.2 SW1.6 | length 6.9
  Top Signal Layer w0.3: R39.1 72.875,68.775 73.6,68.775 74.075,68.3 v1(74.075,67.85) 75.1,67.85 76.05,68.8 R40.2
  Bottom Signal Layer w0.3: v1(74.075,67.85) SW1.6
NetVD2_1: VD2.1 X4.2 | length 3.5
  Top Signal Layer w0.5: X4.2 66.14,67.04 VD2.1
NetVD3_1: VD3.1 VT1.5 VT1.6 X3.1 | length 22.6
  Top Signal Layer w0.2: VT1.6 VT1.5 v1(67.85,37.125)
  Top Signal Layer w0.5: v1(55.3,36.95) 56.9,36.95 VD3.1 58.225,37.025 58.8,36.45 58.8,34.7 X3.1
  Bottom Signal Layer w0.3: v1(55.3,36.95) 55.475,37.125 v1(67.85,37.125)
pads on no net: DD1.24 DD1.25 DD1.26 DD1.30 DD1.44 Z1.
copper on no net:
  other v1: 21.475,57.425

## Polygon pours and split planes (outlines as drawn)
NetGB1_1 on Power Layer "Top Layer-No Net" (solid, remove dead copper, pour order 0): 17,46.675 17,37.5 22.9,37.5 23,37.5 23,31.5 26.125,31.5 26.125,41.4 24,41.4 24,46.675
3,7В on Power Layer "Top Layer-No Net" (solid, remove dead copper, pour order 2): 26.5,31.5 26.5,36.35 29.325,36.35 29.325,41.95 24.5,41.95 24.5,46.675 33.2,46.675 33.2,41.95 32.075,41.95 32.075,31.5
3,3В on Power Layer "Top Layer-No Net" (solid, pour order 4): 35.7,31.5 32.575,31.5 32.575,41.525 35.9,41.525 35.9,47.225 35.9,47.075 29.875,47.075 29.875,55.65 29.475,55.65 29.475,47.225 23,47.225 23,53.425 26.825,53.425 26.825,58.175 23,58.175 23,63 32,63 32,69.15 86.9,69.15 86.9,68.9 86.9,58.8 92.5,58.8 92.5,37.5 87,37.5 87,31.5 35.9,31.5
GND on Ground Layer "Top Layer-No Net" (solid, remove dead copper, pour order 6): 23,31.5 23,37.5 17,37.5 17,63 23,63 23,69.2 86.9,69.2 86.9,63 92.5,63 92.5,37.5 87,37.5 87,31.5 75.7,31.5
3,3В on Top Signal Layer "Top Layer-No Net" (solid, remove dead copper, pour order 86): 75.575,57.225 75.575,59.65 73.375,59.65 73.375,57.225
3,3В on Top Signal Layer "Top Layer-No Net" (solid, remove dead copper, pour order 84): 81.8,58.3 81.8,53.525 85.7,53.525 85.7,59 81.8,59 81.8,58.275
3,3В on Top Signal Layer "Top Layer-No Net" (solid, remove dead copper, pour order 82): 82.275,49.775 84.45,49.775 84.45,44.75 81.8,44.75 81.8,49.775 82.25,49.775
GND on Top Signal Layer "Top Layer-No Net" (solid, remove dead copper, pour order 38): 49.175,41.325 49.175,44.25 51.625,44.25 51.625,41.325
3,3В on Top Signal Layer "Top Layer-No Net" (solid, remove dead copper, pour order 36): 46.425,41.325 48.875,41.325 48.875,43.425 46.425,43.425
GND on Top Signal Layer "Top Layer-No Net" (solid, remove dead copper, pour order 34): 40.375,42.025 43.2,42.025 43.2,39.5 40.375,39.5
GND on Top Signal Layer "Top Layer-No Net" (solid, remove dead copper, pour order 32): 45.425,47.825 45.425,50.075 42.525,50.075 42.525,47.825
3,3В on Top Signal Layer "Top Layer-No Net" (solid, remove dead copper, pour order 30): 43.15,50.825 40.375,50.825 40.375,52.75 43.15,52.75
GND on Top Signal Layer "Top Layer-No Net" (solid, remove dead copper, pour order 28): 65.1,59.1 65.1,41.475 62.525,41.475 62.525,59.1
GND on Top Signal Layer "Top Layer-No Net" (solid, remove dead copper, pour order 26): 27,53.511 27,57.95 22.975,57.95 22.975,53.511
3,3В on Top Signal Layer "Top Layer-No Net" (solid, remove dead copper, pour order 24): 22.975,49.625 22.975,53.425 27.25,53.425 27.25,57.95 29.475,57.95 29.475,49.65 23,49.65
3,3В on Top Signal Layer "Top Layer-No Net" (solid, remove dead copper, pour order 22): 29.875,48.225 29.875,51.65 33.2,51.65 33.2,48.225
NetDA1_3 on Top Signal Layer "Top Layer-No Net" (solid, remove dead copper, pour order 20): 27.4,44.6 22.975,44.6 22.975,49.35 29.025,49.35 29.025,47.225 27.025,47.225 27.025,45.675 27.4,45.675 27.4,44.575
GND on Top Signal Layer "Top Layer-No Net" (solid, remove dead copper, pour order 18): 31.65,42.825 31.65,44.5 32.725,45.575 32.95,45.8 35.675,45.8 35.675,41.775 32.325,41.775 32.325,42.825
3,7В on Top Signal Layer "Top Layer-No Net" (solid, remove dead copper, pour order 14): 28.6,43.9 28.6,46.65 29.85,46.65 29.85,43.9
3,7В on Top Signal Layer "Top Layer-No Net" (solid, pour order 12): 27.9,42.3 24.5,42.3 24.5,44.346 27.9,44.346
GND on Top Signal Layer "Top Layer-No Net" (solid, remove dead copper, pour order 10): 29.25,41.775 29.25,36.65 27.975,36.65 27.975,34.9 26.225,34.9 26.225,41.775
3,7В on Top Signal Layer "Top Layer-No Net" (solid, remove dead copper, pour order 8): 26.875,31.525 26.875,34.4 28.2,34.4 28.2,36.425 29.5,36.425 29.5,42.375 32.075,42.375 32.075,31.525
GND on Top Signal Layer "Top Layer-No Net" (solid, remove dead copper, pour order 42): 25,62.1 25,64.275 30.5,64.275 30.5,69 23,69 23,62.1 25,62.1
3,3В on Top Signal Layer "Top Layer-No Net" (solid, remove dead copper, pour order 46): 33.5,63.1 33.5,60.625 36.65,60.625 36.65,63.1 33.475,63.1
GND on Top Signal Layer "Top Layer-No Net" (solid, remove dead copper, pour order 48): 33.5,60.1 33.5,57.825 35.55,57.825 35.55,59.175 36.55,59.175 36.55,60.1
3,3В on Top Signal Layer "Top Layer-No Net" (solid, remove dead copper, pour order 50): 75.7,31.525 75.7,34.975 70.95,34.975 70.95,31.5 75.7,31.5
GND on Top Signal Layer "Top Layer-No Net" (solid, remove dead copper, pour order 52): 73.275,37.925 73.275,40.875 76.45,40.875 76.45,39.825 76.45,39.675 74.7,37.925
GND on Top Signal Layer "Top Layer-No Net" (solid, remove dead copper, pour order 60): 50.475,66.575 50.475,68.475 47.9,68.475 47.9,66.575
3,3В on Top Signal Layer "Top Layer-No Net" (solid, remove dead copper, pour order 62): 41.525,69.225 44.2,69.225 44.2,66.9 41.525,66.9
GND on Top Signal Layer "Top Layer-No Net" (solid, remove dead copper, pour order 66): 40.925,69.275 40.925,66.9 38.775,66.9 38.775,69.275
GND on Top Signal Layer "Top Layer-No Net" (solid, remove dead copper, pour order 68): 77.875,69.3 77.875,59.275 80.6,59.275 80.6,69.3
GND on Top Signal Layer "Top Layer-No Net" (solid, remove dead copper, pour order 72): 60.6,40.476 56.075,40.471 56.075,38.9 60.6,38.9
GND on Top Signal Layer "Top Layer-No Net" (solid, remove dead copper, pour order 74): 54.875,31.5 54.875,35.375 58.3,35.375 58.3,31.5
3,3В on Top Signal Layer "Top Layer-No Net" (solid, remove dead copper, pour order 76): 64.35,36.475 64.35,33.2 67.225,33.2 67.225,36.475
3,3В on Top Signal Layer "Top Layer-No Net" (solid, remove dead copper, pour order 78): 64.65,65.675 68.2,65.675 68.2,61.4 64.65,61.4
3,3В on Top Signal Layer "Top Layer-No Net" (solid, remove dead copper, pour order 80): 53.175,57.95 53.175,59.3 51.5,59.3 51.5,60.5 53.175,60.5 53.175,61.25 57.075,61.25 57.075,57.95
GND on Bottom Signal Layer "Top Layer-No Net" (solid, remove dead copper, pour order 40): 23,69 23,63 30.35,63 30.35,69 23,69
MCU_RESET on Bottom Signal Layer "Top Layer-No Net" (solid, remove dead copper, pour order 44): 30.6,67.375 30.6,63.95 35.3,63.95 35.3,67.375
3,3В on Bottom Signal Layer "Top Layer-No Net" (solid, remove dead copper, pour order 70): 80.6,60.45 83.85,60.45 83.85,69.2 80.6,69.2

## Keep-outs
Keep-Out Layer:
  lines w0.25: 16.05,32.45 16.05,68.205 ; 18.05,30.45 91.895,30.45 ; 18.05,70.195 91.895,70.195 ; 93.795,32.45 93.795,68.205
  lines w0.254: 16.05,32.45 ccw(c18.05,32.45) 18.05,30.45 ; 16.05,68.195 cw(c18.05,68.195) 18.05,70.195 ; 91.795,30.45 ccw(c91.795,32.45) 93.795,32.45 ; 91.795,70.195 cw(c91.795,68.195) 93.795,68.195

## Other copper
Power Layer:
  pour cut-out: 58.225,35.75 55.675,35.75 55.675,34.325 58.225,34.325
  pour cut-out: 49.575,51.6 49.575,53.585 47.575,53.585 47.575,51.6
  pour cut-out: 51.425,44.375 48.875,44.375 48.875,42.925 48.9,42.9 51.425,42.9
  pour cut-out: 52.475,62.15 52.475,64.7 51.025,64.7 51,64.675 51,62.15
  pour cut-out: 45.75,47.575 45.75,50.125 44.3,50.125 44.275,50.1 44.275,47.575
  pour cut-out: 41.5,39.625 41.5,42.175 40.05,42.175 40.025,42.15 40.025,39.625
  pour cut-out: 52.475,54.925 52.475,59.4 51,59.4 51,54.925
  pour cut-out: 62.325,41.275 63.875,41.275 63.875,60.5 62.325,60.5
  pour cut-out: 35.7,34.322 63.978,34.322 64,34.3 64,31.5 35.7,31.5
  pour cut-out: 35.9,45.8 36.091,45.8 38.9,45.8 38.9,51.6 33.2,51.6 33.2,45.8
  pour cut-out: 49.2,45.8 49.391,45.8 52.2,45.8 52.2,51.6 46.5,51.6 46.5,45.8
  pour cut-out: 87,31.5 87,33.872 86.972,33.9 75.7,33.9 75.7,31.5
  pour cut-out: 57,69.2 57,63.5 64,63.5 64,69.2
  pour cut-out: 80,45.5 80,55.07 80.01,55.08 79.99,55.1 73.2,55.1 73.2,59.1 70.7,59.1 70.7,41.5 73,41.5 73,45.474 72.983,45.49 72.993,45.5
  pour cut-out: 48.3,60 48.3,62.55 46.85,62.55 46.825,62.525 46.825,60
  pour cut-out: 35.35,57.719 35.35,60.269 33.9,60.269 33.875,60.244 33.875,57.719
  pour cut-out: 37.45,54.75 37.45,59.032 35.975,59.032 35.975,57.275 35.975,54.75
  pour cut-out: 46.371,56.6 40.025,56.6 40.025,55.125 42.425,55.125 46.371,55.125
  pour cut-out: 40.1,65.55 40.1,69.175 39.025,69.175 38.443,69.175 38.443,65.55
  pour cut-out: 74.875,60.7 74.875,68.575 73.4,68.575 73.4,60.7
  pour cut-out: 41.675,59.525 41.675,64.45 40.2,64.45 40.2,62.05 40.2,59.525
Ground Layer:
  pour cut-out: 85.725,53.375 85.725,59.175 83.525,59.175 83.525,53.375
  pour cut-out: 84.656,48.625 84.656,51.3 83.1,51.3 83.1,48.625
  pour cut-out: 84.575,45.975 82.046,45.975 82.046,44.525 84.575,44.525
  pour cut-out: 47.725,41 47.725,43.425 46.275,43.425 46.275,41
  pour cut-out: 47.025,37.925 47.025,42.225 45.575,42.225 45.575,37.925
  pour cut-out: 52.45,54.975 52.45,59.45 51,59.45 51,54.975
  pour cut-out: 37.45,54.775 37.45,59.075 36,59.075 36,54.775
  pour cut-out: 27.1,55.725 29.65,55.725 29.65,58.175 27.1,58.175
  pour cut-out: 31.95,49.65 31.95,52 30.475,52 30.475,49.65
  pour cut-out: 22.775,49.55 29.025,49.55 29.025,51 22.75,51 22.75,49.525
  pour cut-out: 26.725,44.45 24.3,44.45 24.3,42.1 24.325,42.075 26.725,42.075
  pour cut-out: 30.85,34.675 32.375,34.675 32.375,42.725 30.85,42.725
  pour cut-out: 32.375,31.5 23,31.5 23,34.679 32.375,34.679
  pour cut-out: 70.8,41.5 70.8,59 73,59 73,41.5
  pour cut-out: 77.5,45.5 77.5,48.1 80,48.1 80,55.07 80.01,55.08 79.99,55.1 75.5,55.1 75.5,45.5
  pour cut-out: 83.2,31.5 83.2,33.9 77.325,33.9 75.7,33.9 75.7,35.15 71.675,35.15 71.675,31.5
  pour cut-out: 59.5,68 64,68 63.99,67.99 63.99,63.55 57.05,63.55 57,63.6 57,65.5 59.5,65.5
  pour cut-out: 52.475,62.225 52.475,64.65 51.025,64.65 51.025,62.225
  pour cut-out: 31.975,64.375 31.975,66.975 30.525,66.975 30.525,64.375
  pour cut-out: 48.3,60.075 48.3,62.5 46.85,62.5 46.85,60.075
  pour cut-out: 41.675,59.55 41.675,64.5 40.225,64.5 40.225,59.55
  pour cut-out: 74.85,60.75 74.85,68.532 73.275,68.532 73.275,60.75
  pour cut-out: 83.95,60.8 83.95,68.582 82.3,68.582 82.3,60.8

## Silkscreen, mask and mechanical layers (free items; w line width, h text height)
Top Overlay:
  circle w0.254: c19.58,66.745 r2.4
  circle w0.254: c90.595,66.745 r2.4
  circle w0.254: c90.595,33.9 r2.4
  circle w0.254: c19.58,33.9 r2.4
  circle w0.254: c58.95,53.15 r0.875
  lines w0.25: 55.375,54.025 58.075,54.025 58.95,53.15 57.95,52.15 55.4,52.15 ; 57.6,54.025 59.05,54.025 ; 55,43.55 61.175,43.55 61.175,55.6 55,55.6 55,43.55
  lines w0.254: 55.345,54.081 cw(c56.625,53.825) 57.873,54.206
  text "V.P." at 60.925,52.3 h1.52 r90
  text "Kapitoshka" at 58.725,44.025 h2 r90
  text "v1.0 06.2017" at 59.95,43.975 h1 r90
Bottom Overlay:
  circle w0.254: c19.58,66.745 r2.4
  circle w0.254: c90.595,66.745 r2.4
  circle w0.254: c90.595,33.9 r2.4
  circle w0.254: c19.58,33.9 r2.4
  circle w0.254: c76.525,37.45 r0.875
  lines w0.25: 75.65,37.35 75.65,38.8 ; 75.65,41.025 75.65,38.325 76.525,37.45 77.525,38.45 77.525,41 ; 74.075,35.225 74.075,41.4 86.125,41.4 86.125,35.225 74.075,35.225
  lines w0.254: 75.469,38.527 cw(c75.85,39.775) 75.594,41.055
  text "Kapitoshka" at 85.65,37.675 h2
  text "v1.0 06.2017" at 85.7,36.45 h1
  text "V.P." at 77.375,35.475 h1.52